# Altium PCB LV1.PCBDOC (part 2 of 2)
Units mm, origin at the board's own origin, x right, y up, seen from the top; angles counter-clockwise.
Board outline 220.06 x 100 mm, 4 copper layers (Component Side, Signal Layer 1, Signal Layer 2, Bottom Layer), stack 0.905 mm thick; 203 components, 130 nets, 643 pads, 1043 vias.
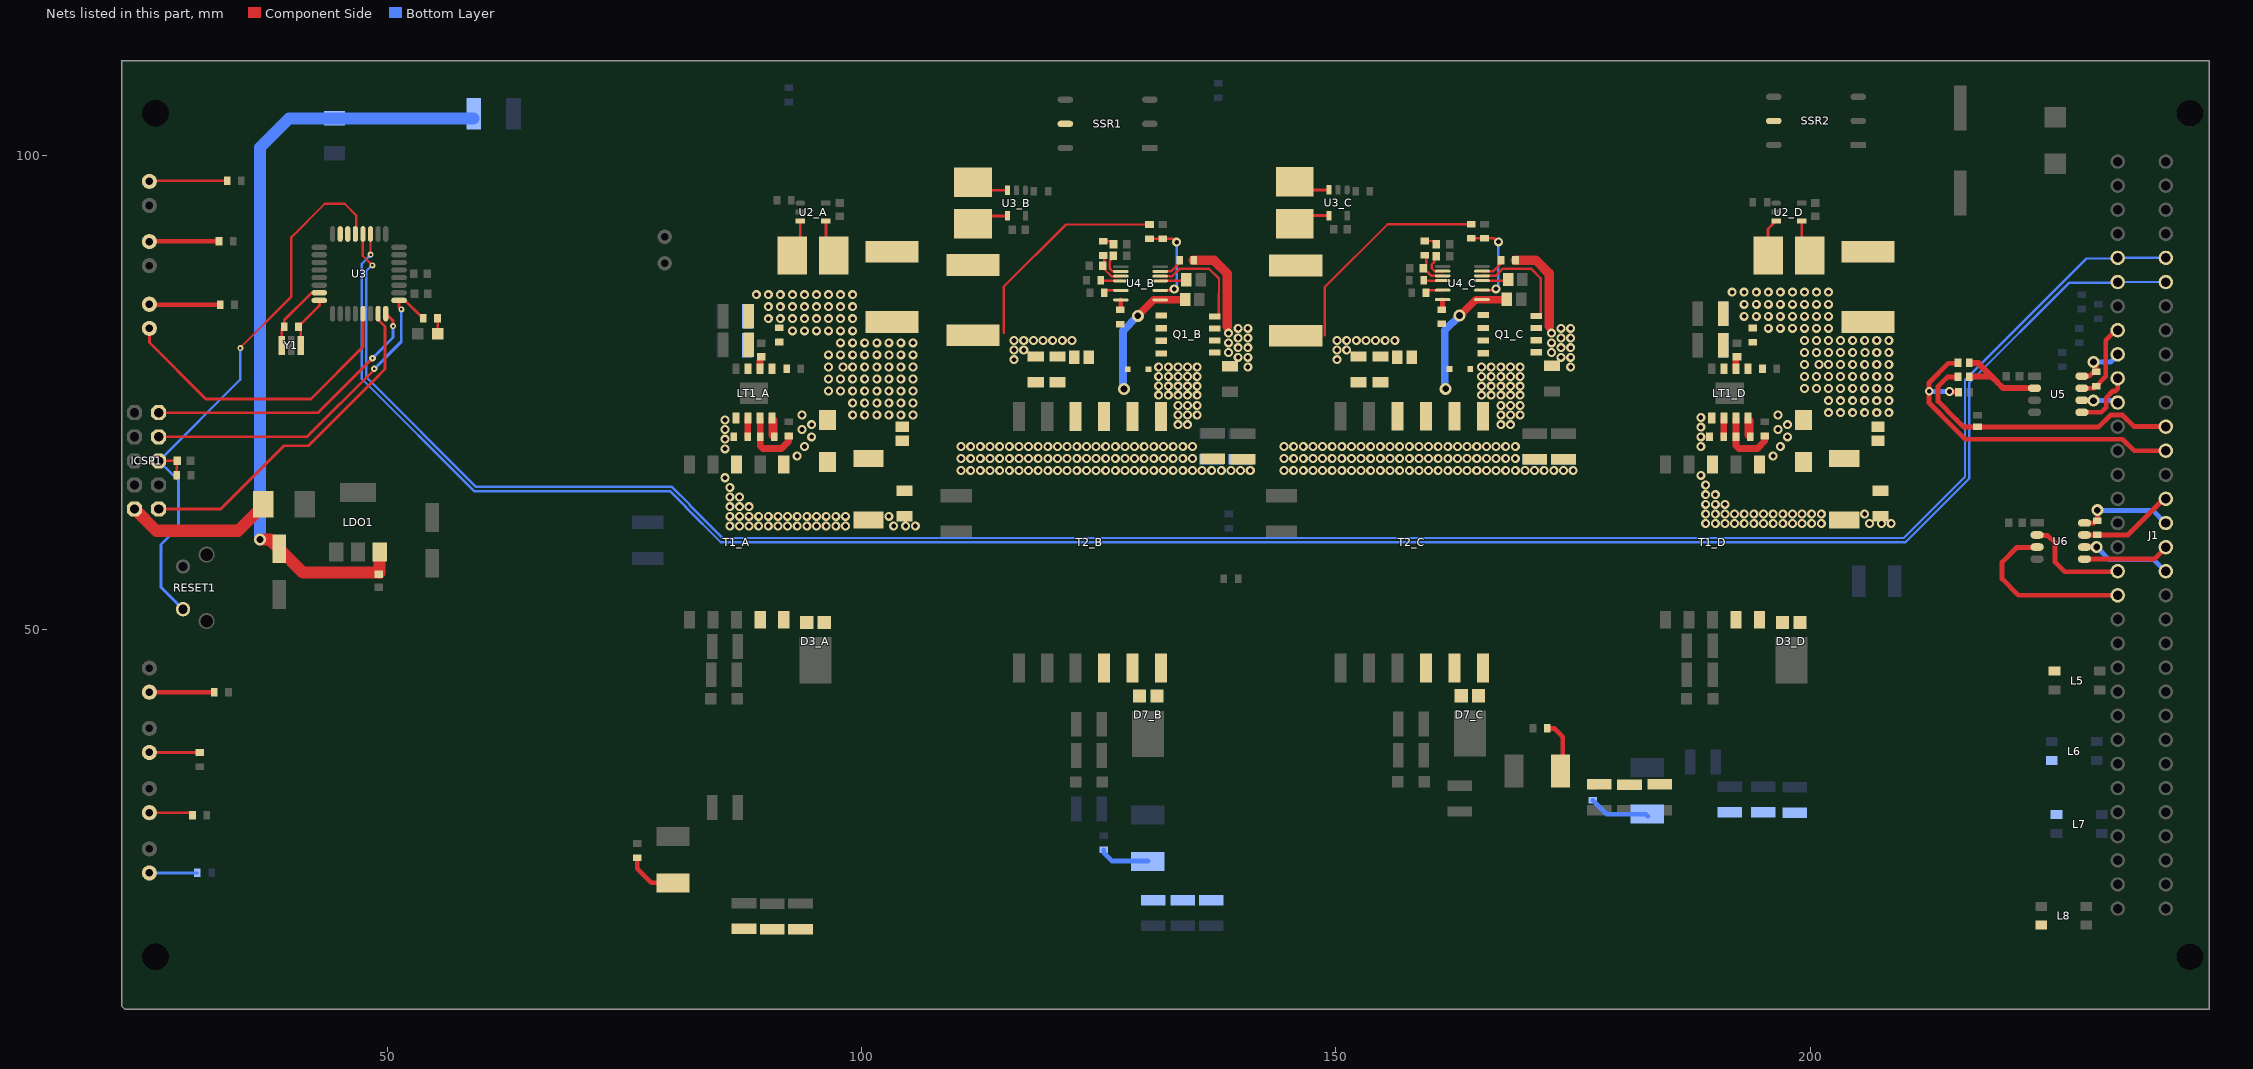
[diagram p4: the nets of this part, all layers, seen from the top]

## Via types
v1: diameter 0.95, hole 0.5, Component Side to Bottom Layer, 704 vias
v2: diameter 1.27, hole 0.711, Component Side to Bottom Layer, 313 vias
v3: diameter 0.635, hole 0.254, Component Side to Bottom Layer, 14 vias
v4: diameter 0.672, hole 0.381, Component Side to Bottom Layer, 4 vias
v5: diameter 0.762, hole 0.381, Component Side to Bottom Layer, 4 vias
v6: diameter 0.7, hole 0.254, Component Side to Bottom Layer, 3 vias
v7: diameter 0.9, hole 0.5, Component Side to Bottom Layer, 1 vias

## Nets (pads, with @x,y where several pads share a name; then routed paths per layer and width w, separated by ;. In a path a pad name is that pad's centre, name@x,y a point inside that pad or via, vN(x,y) a via of type N, cw(c..) or ccw(c..) an arc to the next point about the centre after c; other vN are vias at no path point) (continued)
LED2: D10.1 U3.13 | length 32.2
  Component Side w0.3: D10.1@24.924,81.788 24.924,80.296 30.87,74.35 41.96,74.35 47.46,79.85 U3.13@47.46,83.29
MISO: ICSP1.9 U3.16 | length 30.8
  Component Side w0.3: ICSP1.9@25.908,72.898 42.698,72.898 v6@48.385,78.585 ; U3.16@49.85,83.35 50.614,82.586 v3(50.614,82.018)
  Bottom Layer w0.3: v6(48.444,78.638) 50.62,80.814 v3@50.62,82.02
MOSI: ICSP1.1 U3.15 | length 36
  Component Side w0.3: ICSP1.1@25.908,62.738 32.448,62.738 39.12,69.41 41.69,69.41 41.69,69.42 42.057,69.787 42.057,69.79 48.57,76.303 48.573,76.303 49.76,77.49 49.76,81.986 49.03,82.716 49.03,83.22 U3.15@49.01,83.24
NetAC2_2: AC2.2 C1.1 DTVS1.1 F1.2 LDO1.3 | length 81.1
  Component Side w1.27: v2(36.59,59.52) 37.62,59.52 C1.1@38.51,58.63 ; C1.1@38.608,58.547 41.105,56.05 AC2.2@49.15,56.05 ; AC2.2@49.19,56.01 LDO1.3@49.19,58.23
  Bottom Layer w1.27: v2@36.6,59.6 36.6,100.862 39.624,103.886 F1.2@59.114,103.886
NetAR2_1: AR2.1 LED1.A | length 1.6
  Component Side w0.254: LED1.A@55.33,81.23 AR2.1@55.33,82.81
NetAR6_2: AR6.2 LED2.2 | length 8
  Component Side w0.3: LED2.2@25.146,97.344 AR6.2@33.12,97.344
NetC4_A_2: C4_A.2 C5_A.2 C6_A.2 C7_A.2 C8_A.2 D2_A.1 F2_A.2 LT1_A.3 R3_A.2 T1_A.5
  other v1: 93.218,68.326 93.98,69.342 94.742,70.358 93.726,71.12 94.742,71.628 93.726,72.644 99.06,72.644 100.33,72.644 101.6,72.644 102.87,72.644 104.14,72.644 105.41,72.644 99.06,73.914 100.33,73.914 101.6,73.914 102.87,73.914 104.14,73.914 105.41,73.914 96.52,75.184 97.79,75.184 99.06,75.184 100.33,75.184 101.6,75.184 102.87,75.184 104.14,75.184 105.41,75.184 96.52,76.454 97.79,76.454 99.06,76.454 100.33,76.454 101.6,76.454 102.87,76.454 104.14,76.454 105.41,76.454 96.52,77.724 98.044,77.724 99.06,77.724 100.33,77.724 101.6,77.724 102.87,77.724 104.14,77.724 105.41,77.724 102.895,78.969 96.52,78.994 97.79,78.994 99.06,78.994 100.33,78.994 101.6,78.994 104.14,78.994 105.41,78.994 97.79,80.264 99.06,80.264 100.33,80.264 101.6,80.264 102.87,80.264 104.14,80.264 105.41,80.264 92.71,81.534 93.98,81.534 95.25,81.534 96.52,81.534 97.79,81.534 99.06,81.534 90.17,82.804 91.44,82.804 92.71,82.804 93.98,82.804 95.25,82.804 96.52,82.804 97.79,82.804 99.06,82.804 90.17,84.074 91.44,84.074 92.71,84.074 93.98,84.074 95.25,84.074 96.52,84.074 97.79,84.074 99.06,84.074 88.9,85.344 90.17,85.344 91.44,85.344 92.71,85.344 93.98,85.344 95.25,85.344 96.52,85.344 97.79,85.344 99.06,85.344
NetC4_D_2: C4_D.2 C5_D.2 C6_D.2 C7_D.2 C8_D.2 D2_D.1 F2_D.2 LT1_D.3 R3_D.2 T1_D.5
  other v1: 196.088,68.326 196.85,69.342 197.612,70.358 196.596,71.12 197.612,71.628 196.596,72.644 201.93,72.898 203.2,72.898 204.47,72.898 205.74,72.898 207.01,72.898 208.28,72.898 201.93,74.168 203.2,74.168 204.47,74.168 205.74,74.168 207.01,74.168 208.28,74.168 199.39,75.438 200.66,75.438 201.93,75.438 203.2,75.438 204.47,75.438 205.74,75.438 207.01,75.438 208.28,75.438 199.39,76.708 200.66,76.708 201.93,76.708 203.2,76.708 204.47,76.708 205.74,76.708 207.01,76.708 208.28,76.708 199.39,77.978 200.914,77.978 201.93,77.978 203.2,77.978 204.47,77.978 205.74,77.978 207.01,77.978 208.28,77.978 199.39,79.248 200.66,79.248 201.93,79.248 203.2,79.248 204.47,79.248 205.765,79.248 207.01,79.248 208.28,79.248 199.39,80.518 200.66,80.518 201.93,80.518 203.2,80.518 204.47,80.518 205.74,80.518 207.01,80.518 208.28,80.518 195.58,81.788 196.85,81.788 198.12,81.788 199.39,81.788 200.66,81.788 201.93,81.788 193.04,83.058 194.31,83.058 195.58,83.058 196.85,83.058 198.12,83.058 199.39,83.058 200.66,83.058 201.93,83.058 193.04,84.328 194.31,84.328 195.58,84.328 196.85,84.328 198.12,84.328 199.39,84.328 200.66,84.328 201.93,84.328 191.77,85.598 193.04,85.598 194.31,85.598 195.58,85.598 196.85,85.598 198.12,85.598 199.39,85.598 200.66,85.598 201.93,85.598
NetC5_A_1: C5_A.1 R4_A.2
NetC5_D_1: C5_D.1 R4_D.2
NetC11_A_1: C11_A.1 LT1_A.2 | length 0.8
  Component Side w0.7: LT1_A.2@89.294,77.534 89.294,78.353
NetC11_D_1: C11_D.1 LT1_D.2 | length 0.8
  Component Side w0.7: LT1_D.2@192.164,77.534 192.164,78.353
NetC13_B_2: C13_B.2 C14_B.2 C15_B.2 C16_B.2 C17_B.2 F3_B.2 R8_B.2 R10_B.1 R11_B.1 T2_B.3 T2_B.4 U4_B.1 | length 36.9
  Component Side w0.254: 114.97,81.31 114.97,86.167 121.543,92.74 R8_B.2@130.35,92.74
  Component Side w0.8: v2(129.124,83.11) 130.803,84.789 U4_B.1@131.481,84.789 C13_B.2@134.105,84.789
  Bottom Layer w0.8: v2@127.561,75.476 127.561,81.547 v2(129.124,83.11)
  other v1: 110.49,66.802 111.506,66.802 112.522,66.802 113.538,66.802 114.554,66.802 115.57,66.802 116.586,66.802 117.602,66.802 118.618,66.802 119.634,66.802 120.65,66.802 121.666,66.802 122.682,66.802 123.698,66.802 124.714,66.802 125.73,66.802 126.746,66.802 127.762,66.802 128.778,66.802 129.794,66.802 130.81,66.802 131.826,66.802 132.842,66.802 133.858,66.802 134.874,66.802 135.89,66.802 136.906,66.802 137.922,66.802 138.938,66.802 139.954,66.802 140.97,66.802 110.49,68.072 111.506,68.072 112.522,68.072 113.538,68.072 114.554,68.072 115.57,68.072 116.586,68.072 117.602,68.072 118.618,68.072 119.634,68.072 120.65,68.072 121.666,68.072 122.682,68.072 123.698,68.072 124.714,68.072 125.73,68.072 126.746,68.072 127.762,68.072 128.778,68.072 129.794,68.072 130.81,68.072 131.826,68.072 132.842,68.072 133.858,68.072 134.874,68.072 110.49,69.342 111.506,69.342 112.522,69.342 113.538,69.342 114.554,69.342 115.57,69.342 116.586,69.342 117.602,69.342 118.618,69.342 119.634,69.342 120.65,69.342 121.666,69.342 122.682,69.342 123.698,69.342 124.714,69.342 125.73,69.342 126.746,69.342 127.762,69.342 128.778,69.342 129.794,69.342 130.81,69.342 131.826,69.342 132.842,69.342 133.858,69.342 134.874,69.342
  other v2: 127.651,75.386
NetC13_C_2: C13_C.2 C14_C.2 C15_C.2 C16_C.2 C17_C.2 F3_C.2 R8_C.2 R10_C.1 R11_C.1 T2_C.3 T2_C.4 U4_C.1 | length 37.2
  Component Side w0.254: 148.83,81.08 148.83,86.139 155.459,92.768 R8_C.2@164.266,92.768
  Component Side w0.8: v2(163.04,83.138) 164.719,84.817 U4_C.1@165.397,84.817 C13_C.2@168.021,84.817
  Bottom Layer w0.8: v2@161.477,75.504 161.477,81.575 v2(163.04,83.138)
  other v1: 144.526,66.802 145.542,66.802 146.558,66.802 147.574,66.802 148.59,66.802 149.606,66.802 150.622,66.802 151.638,66.802 152.654,66.802 153.67,66.802 154.686,66.802 155.702,66.802 156.718,66.802 157.734,66.802 158.75,66.802 159.766,66.802 160.782,66.802 161.798,66.802 162.814,66.802 163.83,66.802 164.846,66.802 165.862,66.802 166.878,66.802 167.894,66.802 168.91,66.802 169.926,66.802 170.942,66.802 171.958,66.802 172.974,66.802 173.99,66.802 175.006,66.802 144.526,68.072 145.542,68.072 146.558,68.072 147.574,68.072 148.59,68.072 149.606,68.072 150.622,68.072 151.638,68.072 152.654,68.072 153.67,68.072 154.686,68.072 155.702,68.072 156.718,68.072 157.734,68.072 158.75,68.072 159.766,68.072 160.782,68.072 161.798,68.072 162.814,68.072 163.83,68.072 164.846,68.072 165.862,68.072 166.878,68.072 167.894,68.072 168.91,68.072 144.526,69.342 145.542,69.342 146.558,69.342 147.574,69.342 148.59,69.342 149.606,69.342 150.622,69.342 151.638,69.342 152.654,69.342 153.67,69.342 154.686,69.342 155.702,69.342 156.718,69.342 157.734,69.342 158.75,69.342 159.766,69.342 160.782,69.342 161.798,69.342 162.814,69.342 163.83,69.342 164.846,69.342 165.862,69.342 166.878,69.342 167.894,69.342 168.91,69.342
  other v2: 161.567,75.414
NetC18_B_1: C18_B.1 D6_B.1
NetC18_B_2: C18_B.2 R10_B.2 R11_B.2
  other v1: 116.078,78.486 116.078,79.502 117.094,79.502 116.078,80.518 117.094,80.518 118.11,80.518 119.126,80.518 120.142,80.518 121.158,80.518 122.174,80.518
NetC18_C_1: C18_C.1 D6_C.1
NetC18_C_2: C18_C.2 R10_C.2 R11_C.2
  other v1: 150.114,78.486 150.114,79.502 151.13,79.502 150.114,80.518 151.13,80.518 152.146,80.518 153.162,80.518 154.178,80.518 155.194,80.518 156.21,80.518
NetC21_B_2: C21_B.2 U4_B.10 | length 2.9
  Component Side w0.254: C21_B.2@126.747,89.46 126.179,88.892 126.179,88.091 126.458,87.812 126.482,87.812 126.505,87.789 U4_B.10@127.331,87.789
NetC21_C_2: C21_C.2 U4_C.10 | length 2.7
  Component Side w0.254: C21_C.2@160.528,89.408 160.374,89.254 160.374,88.794 160.095,88.515 160.095,88.119 160.374,87.84 160.398,87.84 160.421,87.817 U4_C.10@161.247,87.817
NetC22_B_2: C22_B.2 R16_B.1 | length 1.5
  Component Side w0.254: R16_B.1@125.469,90.972 126.251,90.972 C22_B.2@126.747,90.476
NetC22_C_2: C22_C.2 R16_C.1 | length 1.5
  Component Side w0.254: R16_C.1@159.385,91 160.167,91 C22_C.2@160.663,90.504
NetC23_B_2: C23_B.2 R16_B.2 U4_B.11 | length 3.4
  Component Side w0.254: R16_B.2@125.588,89.353 125.588,88.026 126.325,87.289 U4_B.11@127.331,87.289
NetC23_C_2: C23_C.2 R16_C.2 U4_C.11 | length 3.5
  Component Side w0.254: R16_C.2@159.504,89.381 159.504,87.892 160.079,87.317 U4_C.11@161.247,87.317
NetC24_B_2: C24_B.2 U4_B.5 | length 2.8
  Component Side w0.254: U4_B.5@131.481,86.789 C24_B.2@134.244,86.789
NetC24_C_2: C24_C.2 U4_C.5 | length 2.8
  Component Side w0.254: U4_C.5@165.397,86.817 C24_C.2@168.16,86.817
NetC27_2: C27.2 C28.2 C29.2 L1.1 L5.1 R24.1 | length 4.8
  Component Side w0.5: R24.1@172.27,39.62 173.04,39.62 173.91,38.75 L1.1@173.91,35.98
NetC31_2: C31.2 C32.2 C33.2 L2.1 L6.3 R25.2 | length 6.5
  Bottom Layer w0.5: R25.2@177.07,32.04 178.53,30.58 182.68,30.58 L2.1@182.89,30.37
NetC35_1: C35.1 C36.1 C37.1 L3.1 L7.4 R26.2 | length 5.4
  Bottom Layer w0.5: R26.2@125.54,26.82 125.54,26.5 126.39,25.65 L3.1@130.23,25.65
NetC41_1: C41.1 C42.1 C43.1 L4.1 L8.2 R31.1 | length 5.8
  Component Side w0.5: R31.1@76.36,25.98 76.36,24.84 77.84,23.36 L4.1@80.43,23.36
NetD1_2: D1.2 ICSP1.2 | length 15.8
  Component Side w1.27: ICSP1.2@23.368,62.738 25.654,60.452 34.29,60.452 D1.2@37.084,63.246
NetD2_A_2: D2_A.2 D5_A.1
NetD2_D_2: D2_D.2 D5_D.1
NetD3_A_1: D3_A.1 T1_A.6 T1_A.7
NetD3_D_1: D3_D.1 T1_D.6 T1_D.7
NetD6_B_2: D6_B.2 Q1_B.5 Q1_B.6 Q1_B.7 Q1_B.8 R9_B.2 T2_B.1 T2_B.2
  other v1: 133.35,71.628 134.366,71.628 133.35,72.644 134.366,72.644 135.382,72.644 133.35,73.66 134.366,73.66 135.382,73.66 131.318,74.738 132.334,74.738 133.35,74.738 134.366,74.738 135.382,74.738 132.334,75.692 133.35,75.692 134.366,75.692 135.382,75.692 131.32,75.72 131.318,76.708 132.334,76.708 133.35,76.708 134.366,76.708 135.382,76.708 131.318,77.724 132.334,77.724 133.35,77.724 134.366,77.724 135.382,77.724
NetD6_C_2: D6_C.2 Q1_C.5 Q1_C.6 Q1_C.7 Q1_C.8 R9_C.2 T2_C.1 T2_C.2
  other v1: 167.386,71.628 168.402,71.628 167.386,72.644 168.402,72.644 169.418,72.644 167.386,73.66 168.402,73.66 169.418,73.66 165.354,74.738 166.37,74.738 167.386,74.738 168.402,74.738 169.418,74.738 165.354,75.692 166.37,75.692 167.386,75.692 168.402,75.692 169.418,75.692 165.354,76.708 166.37,76.708 167.386,76.708 168.402,76.708 169.418,76.708 165.354,77.724 166.37,77.724 167.386,77.724 168.402,77.724 169.418,77.724
NetD7_B_1: D7_B.1 T2_B.10 T2_B.11 T2_B.12
NetD7_C_1: D7_C.1 T2_C.10 T2_C.11 T2_C.12
NetD9_2: D9.2 R27.1 | length 7.4
  Component Side w0.5: D9.2@24.892,90.983 R27.1@32.27,90.983
NetD10_2: D10.2 R28.1 | length 7.5
  Component Side w0.5: D10.2@24.943,84.277 R28.1@32.397,84.277
NetD11_1: D11.1 R30.1 | length 5.3
  Bottom Layer w0.3: D11.1@24.67,24.384 R30.1@29.984,24.384
NetD12_1: D12.1 R32.1 | length 4.6
  Component Side w0.3: D12.1@24.67,30.734 R32.1@29.222,30.734
NetD13_1: D13.1 R33.1 | length 5.3
  Component Side w0.3: D13.1@24.67,37.084 R33.1@29.984,37.084
NetD14_1: D14.1 R34.1 | length 6.5
  Component Side w0.5: D14.1@25.146,43.434 R34.1@31.662,43.434
NetF2_A_1: F2_A.1 R2_A.2 U2_A.4 | length 2.8
  Component Side w0.3: R2_A.2@96.232,90.322 U2_A.4@96.232,93.094
NetF2_D_1: F2_D.1 R2_D.2 U2_D.4 | length 2.8
  Component Side w0.3: R2_D.2@199.102,90.322 U2_D.4@199.102,93.094
NetF3_B_1: F3_B.1 R7_B.2 U3_B.4 | length 2.8
  Component Side w0.3: R7_B.2@112.596,93.646 U3_B.4@115.368,93.646
NetF3_C_1: F3_C.1 R7_C.2 U3_C.4 | length 2.8
  Component Side w0.3: R7_C.2@146.512,93.674 U3_C.4@149.284,93.674
NetJ1_14: J1.14 R23.1 U6.7 | length 10.1
  Component Side w0.508: U6.7@228.914,60.008 233.49,60.008 237.236,63.754 J1.14@237.49,63.754
NetJ1_15: J1.15 R23.2 U6.8 | length 10.5
  Component Side w0.508: U6.8@228.914,61.278 229.934,61.278 R23.2@230.264,61.608 ; v2(230.264,62.624) R23.2@230.264,61.608 ; R23.2@230.378,61.722 R23.2@230.264,61.608
  Bottom Layer w0.508: v2(230.264,62.624) 230.294,62.594 236.11,62.594 J1.15@237.49,61.214
NetJ1_16: J1.16 U6.5 | length 9.1
  Component Side w0.508: U6.5@228.914,57.468 236.284,57.468 J1.16@237.49,58.674
NetJ1_17: J1.17 U6.6 | length 9.7
  Component Side w0.508: U6.6@228.914,58.738 v2(230.188,58.738)
  Bottom Layer w0.508: v2(230.188,58.738) 231.52,57.406 232.914,57.406 232.916,57.404 236.22,57.404 J1.17@237.49,56.134
NetJ1_39: J1.39 R22.2 U5.7 | length 8.3
  Component Side w0.508: U5.7@228.64,75.479 R22.2@229.911,75.479 ; R22.2@230.124,75.704 231.14,76.72 231.14,80.518 J1.39@232.41,81.788
NetJ1_40: J1.40 R22.1 U5.8 | length 5.4
  Component Side w0.508: U5.8@228.64,76.749 229.403,76.749 R22.1@229.87,77.216 ; v2(229.87,78.232) 230.124,77.978 R22.1@230.124,77.204
  Bottom Layer w0.508: v2(229.87,78.232) 231.648,78.232 J1.40@232.41,78.994
NetJ1_41: J1.41 U5.5 | length 6.4
  Component Side w0.508: U5.5@228.64,72.939 230.673,72.939 231.194,73.46 231.194,74.474 231.906,75.186 232.158,75.186 232.41,75.438 J1.41@232.41,76.454
NetJ1_42: J1.42 U5.6 | length 3.9
  Component Side w0.508: U5.6@228.64,74.209 229.829,74.209 v2(229.87,74.168)
  Bottom Layer w0.508: v2(229.87,74.168) 232.156,74.168 J1.42@232.41,73.914
NetLT1_A_1: LT1_A.1 R3_A.1 R5_A.2
NetLT1_A_6: LT1_A.6 Rfb1_A.1 | length 2
  Component Side w0.7: Rfb1_A.1@88.012,70.339 LT1_A.6@88.012,72.315
NetLT1_A_7: LT1_A.7 Rref1_A.1 Rtc1_A.2 | length 6.9
  Component Side w0.7: LT1_A.7@89.306,72.315 Rtc1_A.2@89.306,70.339 89.306,69.418 89.596,69.128 91.556,69.128 92.342,69.914 Rref1_A.1@92.342,70.434
NetLT1_A_8: LT1_A.8 Rtc1_A.1 | length 3.9
  Component Side w0.7: Rtc1_A.1@90.564,70.497 LT1_A.8@90.564,72.327 90.806,72.085 Rtc1_A.1@90.806,70.339
NetLT1_D_1: LT1_D.1 R3_D.1 R5_D.2
NetLT1_D_6: LT1_D.6 Rfb1_D.1 | length 2
  Component Side w0.7: Rfb1_D.1@190.882,70.339 LT1_D.6@190.882,72.315
NetLT1_D_7: LT1_D.7 Rref1_D.1 Rtc1_D.2 | length 6.9
  Component Side w0.7: LT1_D.7@192.176,72.315 Rtc1_D.2@192.176,70.339 192.176,69.418 192.466,69.128 194.426,69.128 195.212,69.914 Rref1_D.1@195.212,70.434
NetLT1_D_8: LT1_D.8 Rtc1_D.1 | length 3.9
  Component Side w0.7: Rtc1_D.1@193.434,70.497 LT1_D.8@193.434,72.327 193.676,72.085 Rtc1_D.1@193.676,70.339
NetQ1_B_1: Q1_B.1 Q1_B.2 Q1_B.3 R13_B.1 R17_B.2 | length 9.7
  Component Side w1: R13_B.1@134.982,88.952 137.153,88.952 138.55,87.555 138.55,81.967
  other v1: 140.716,77.724 139.7,78.74 140.716,78.74 138.684,79.248 139.7,79.756 140.716,79.756 138.684,80.264 139.7,80.772 140.716,80.772 138.684,81.28 139.7,81.788 140.716,81.788
NetQ1_B_4: Q1_B.4 U4_B.6 | length 11.6
  Component Side w0.254: U4_B.6@131.481,87.289 132.755,87.289 133.529,88.063 136.645,88.063 137.676,87.032 137.676,85.455 137.668,85.447 137.668,83.11 Q1_B.4@136.932,83.11
NetQ1_C_1: Q1_C.1 Q1_C.2 Q1_C.3 R13_C.1 R17_C.2 | length 9.7
  Component Side w1: R13_C.1@168.898,88.98 171.069,88.98 172.466,87.583 172.466,81.995
  other v1: 174.752,77.724 173.736,78.74 174.752,78.74 172.72,79.248 173.736,79.756 174.752,79.756 172.72,80.264 173.736,80.772 174.752,80.772 172.72,81.28 173.736,81.788 174.752,81.788
NetQ1_C_4: Q1_C.4 U4_C.6 | length 11.6
  Component Side w0.254: U4_C.6@165.397,87.317 166.819,87.317 167.283,87.781 167.283,87.783 167.591,88.091 170.561,88.091 171.592,87.06 171.592,85.483 171.577,85.468 171.577,83.138 Q1_C.4@170.848,83.138
NetR8_B_1: R8_B.1 R12_B.2 U4_B.3 | length 9.8
  Component Side w0.254: R8_B.1@130.35,91.24 R12_B.2@131.747,91.24 132.864,91.24 v1@133.198,90.907 ; U4_B.3@131.481,85.789 132.824,85.789 v1(132.959,85.924) ; v1@133.213,90.907 v1@133.213,91.1
  Bottom Layer w0.254: v1(132.959,85.924) 133.213,86.178 v1(133.213,90.877)
NetR8_C_1: R8_C.1 R12_C.2 U4_C.3 | length 10.3
  Component Side w0.254: R8_C.1@164.266,91.268 R12_C.2@165.663,91.268 166.669,91.268 v1@167.107,90.83 ; U4_C.3@165.397,85.817 166.74,85.817 v1(166.875,85.952) 167.03,85.952 v1@167.171,85.811 ; v1(167.129,90.905) v1@167.461,90.905
  Bottom Layer w0.254: v1(166.875,85.952) 167.129,86.206 v1(167.129,90.905)
NetR9_B_1: R9_B.1 U4_B.16 | length 1
  Component Side w0.5: R9_B.1@127.331,83.817 U4_B.16@127.331,84.789
NetR9_C_1: R9_C.1 U4_C.16 | length 1
  Component Side w0.5: R9_C.1@161.247,83.845 U4_C.16@161.247,84.817
NetR13_B_2: R13_B.2 U4_B.7 | length 2.3
  Component Side w0.254: U4_B.7@131.481,87.789 132.613,87.789 133.407,88.583 R13_B.2@133.482,88.583
NetR13_C_2: R13_C.2 U4_C.7 | length 2.3
  Component Side w0.254: U4_C.7@165.397,87.817 166.604,87.817 R13_C.2@167.398,88.611
NetR14_B_2: R14_B.2 U4_B.12 | length 2
  Component Side w0.254: R14_B.2@125.31,86.789 U4_B.12@127.331,86.789
NetR14_C_2: R14_C.2 U4_C.12 | length 1.9
  Component Side w0.254: R14_C.2@159.346,86.817 U4_C.12@161.247,86.817
NetR15_B_1: R15_B.1 U4_B.14 | length 1.5
  Component Side w0.254: R15_B.1@125.85,85.789 U4_B.14@127.331,85.789
NetR15_C_1: R15_C.1 U4_C.14 | length 1.5
  Component Side w0.254: R15_C.1@159.766,85.817 U4_C.14@161.247,85.817
RESET: AC3.1 AR3.1 ICSP1.5 RESET1.2 U3.29 | length 61.5
  Component Side w0.254: ICSP1.5@25.908,67.818 AC3.1@27.788,67.818 ; v3@34.445,79.695 39.89,85.14 39.89,91.39 43.42,94.92 45.52,94.92 46.74,93.7 U3.29@46.74,91.79
  Component Side w0.3: AR3.1@27.81,66.32 AC3.1@27.81,67.76
  Bottom Layer w0.254: ICSP1.5@25.98,67.85 34.51,76.38 v3(34.51,79.7)
  Bottom Layer w0.3: ICSP1.5@25.99,67.76 28.01,65.74 28.01,60.856 26.162,59.008 26.162,54.497 RESET1.2@28.473,52.186
ROB: B5.2 B7.2 U5.2 | length 10.4
  Component Side w0.635: B5.2@216.74,78.16 B5.2@216.77,78.13 ; B7.2@216.77,76.72 216.8,76.69 219.15,76.69 ; B5.2@216.81,78.11 216.83,78.13 217.71,78.13 219.15,76.69 ; U5.2@223.64,75.479 220.343,75.479 219.737,76.085 219.737,76.103 219.15,76.69
RX0: U3.30
RXA: J1.49 U6.2 | length 11.2
  Component Side w0.508: U6.2@224.028,59.944 225.044,59.944 225.806,59.182 225.806,57.15 226.822,56.134 232.354,56.134 J1.49@232.41,56.19
RXB: B5.1 B6.1 J1.12 | length 36
  Component Side w0.508: v1@214.59,75.07 214.64,75.12 v1(214.68,75.12) 214.73,75.07 B6.1@215.62,75.07 B6.1@215.64,75.07 ; B5.1@215.61,78.11 214.56,78.11 212.53,76.08 212.53,75.674 212.52,75.664 212.52,73.93 215.175,71.275 216.346,70.104 231.904,70.104 231.906,70.106 232.914,70.106 234.13,68.89 J1.12@237.49,68.89
  Bottom Layer w0.508: v7@212.87,75.12 v1(214.68,75.12)
  other v7: 212.55,75.15
SCK: AR2.2 ICSP1.7 U3.17 | length 37.5
  Component Side w0.3: ICSP1.7@25.908,70.358 41.548,70.358 v6@48.65,77.46 ; v3@51.51,83.78 51.24,84.05 U3.17@51.24,84.74 51.88,84.74 AR2.2@53.76,82.86
  Bottom Layer w0.3: v6(48.624,77.518) 51.48,80.374 v3@51.48,83.78
  other v3: 51.484,83.798
SCL: J1.4 J1.36 U3.28 | length 230.8
  Component Side w0.254: U3.28@47.42,91.81 47.42,89.442 v3(48.434,88.428)
  Bottom Layer w0.254: v3@48.374,88.404 47.79,87.82 47.78,87.82 47.78,78.931 47.767,78.918 47.767,78.358 47.78,78.345 47.78,76.65 59.35,65.08 80.009,65.08 81.901,63.188 81.901,63.133 85.344,59.69 209.85,59.69 216.31,66.15 216.31,76.35 229.114,89.154 232.354,89.154 J1.36@232.41,89.21 J1.4@237.49,89.21
SDA: J1.5 J1.37 U3.27 | length 230.3
  Component Side w0.254: v3@48.24,89.75 U3.27@48.24,91.74 U3.27@48.24,91.78 ; v3(48.25,89.55) v3@48.25,89.76
  Bottom Layer w0.254: v3@48.3,89.41 48.144,89.41 47.313,88.579 47.313,76.475 59.162,64.626 79.821,64.626 81.447,63 81.447,62.945 85.156,59.236 210.038,59.236 216.764,65.962 216.764,76.05 227.328,86.614 J1.37@232.41,86.614 ; J1.37@232.41,86.67 J1.5@237.49,86.67
SW_A: D5_A.2 LT1_A.5 R4_A.1 Rfb1_A.2 T1_A.3
  other v1: 86.106,60.96 87.122,60.96 88.138,60.96 89.154,60.96 90.17,60.96 91.186,60.96 92.202,60.96 93.218,60.96 94.234,60.96 95.25,60.96 96.266,60.96 97.282,60.96 98.298,60.96 103.378,60.96 104.648,60.96 105.664,60.96 86.106,61.976 87.122,61.976 88.138,61.976 89.154,61.976 90.17,61.976 91.186,61.976 92.202,61.976 93.218,61.976 94.234,61.976 95.25,61.976 96.266,61.976 97.282,61.976 98.298,61.976 102.87,61.976 86.106,62.992 87.122,62.992 88.138,62.992 86.106,64.008 87.122,64.008 86.106,65.024 85.598,66.04 85.598,69.088 85.598,70.104 85.598,71.12 85.598,72.136
SW_D: D5_D.2 LT1_D.5 R4_D.1 Rfb1_D.2 T1_D.3
  other v1: 188.976,61.214 189.992,61.214 191.008,61.214 192.024,61.214 193.04,61.214 194.056,61.214 195.072,61.214 196.088,61.214 197.104,61.214 198.12,61.214 199.136,61.214 200.152,61.214 201.168,61.214 206.248,61.214 207.518,61.214 208.534,61.214 188.976,62.23 189.992,62.23 191.008,62.23 192.024,62.23 193.04,62.23 194.056,62.23 195.072,62.23 196.088,62.23 197.104,62.23 198.12,62.23 199.136,62.23 200.152,62.23 201.168,62.23 205.74,62.23 188.976,63.246 189.992,63.246 191.008,63.246 188.976,64.262 189.992,64.262 188.976,65.278 188.468,66.294 188.468,69.342 188.468,70.358 188.468,71.374 188.468,72.39
TX0: U3.31
TXA: J1.50 U6.3 | length 18.9
  Component Side w0.508: U6.3@223.774,58.674 221.742,58.674 220.218,57.15 220.218,55.372 221.94,53.65 J1.50@232.41,53.65
TXB: B7.1 B8.1 J1.11 | length 30.2
  Component Side w0.508: B7.1@215.57,76.65 214.44,76.65 213.47,75.68 213.47,74.09 215.395,72.165 215.405,72.165 216.18,71.39 ; 216.226,71.374 230.378,71.374 231.648,72.644 231.904,72.644 231.906,72.646 232.914,72.646 234.13,71.43 J1.11@237.49,71.43
VINA: R2_A.1 R7_B.1 SSR1.5 U2_A.3 U3_B.3 | length 5.5
  Component Side w0.3: R2_A.1@93.532,90.322 U2_A.3@93.532,93.094 ; R7_B.1@112.596,96.346 U3_B.3@115.368,96.346
VINB: R2_D.1 R7_C.1 SSR2.5 U2_D.3 U3_C.3 | length 6.7
  Component Side w0.3: R7_C.1@146.512,96.374 U3_C.3@149.284,96.374 ; R2_D.1@195.552,89.472 195.552,92.244 U2_D.3@196.402,93.094
XTAL1: AR1.1 U3.7 Y1.3 | length 7.6
  Component Side w0.3: Y1.3@38.874,80 38.874,81.644 AR1.1@39.15,81.92 ; AR1.1@39.14,81.98 39.14,82.66 42.01,85.53 U3.7@42.8,85.53
XTAL2: AR1.2 U3.8 Y1.1 | length 5.7
  Component Side w0.3: Y1.1@40.89,80 40.89,81.75 40.65,81.99 42.86,84.2 U3.8@42.86,84.71
pads on no net: ICSP1.3 J1.0@240.03,15.55 J1.0@240.03,104.45 RESET1.0 SSR1.3 SSR2.3 T1_A.1 T1_A.2 T1_A.4 T1_A.8 T1_D.1 T1_D.2 T1_D.4 T1_D.8 T2_B.5 T2_B.6 T2_C.5 T2_C.6 U3.2 U3.22

## Polygon pours and split planes (outlines as drawn)
-5VARTN on Bottom Layer "-5VGNDA_L02_P642" (solid, pour order 3477): 102.248,33.02 86.106,33.02 86.106,57.976 102.248,57.976
-5VARTN on Bottom Layer "Component Side-No Net 2" (solid, pour order 3449): 86.106,57.15 86.106,54.61 75.946,54.61 75.946,58.166 82.55,58.166 83.566,57.15 83.82,57.15
-5VA on Bottom Layer "-5VA_L01_P619" (solid, pour order 3468): 84.976,54.102 75.832,54.102 75.832,34.036 84.976,34.036
+5VARTN on Bottom Layer "Component Side-No Net" (solid, pour order 3479): 123.222,14.746 123.222,52.832 108.458,52.832 108.458,14.727
+5VARTN on Bottom Layer "Component Side-No Net" (solid, pour order 3478): 108.48,14.559 108.48,19.601 211.096,19.601 211.096,14.502
+5VA on Bottom Layer "Component Side-No Net" (solid, pour order 3469): 124.746,29.7 124.746,47.646 135.795,47.646 135.795,29.7
GND on Bottom Layer "Component Side-No Net 2" (solid, pour order 3444): 208.28,56.896 212.852,56.896 213.614,56.134 213.868,55.88 213.868,53.34 208.28,53.34
GND on Bottom Layer "Component Side-No Net 2" (solid, pour order 3474): 210.058,50.292 210.058,60.96 237.998,60.96 238.252,60.706 238.252,50.292
NetC4_D_2 on Bottom Layer "NETC11_LV4_2_L01_P618" (solid, remove dead copper, pour order 3472): 208.788,86.106 190.246,86.106 190.246,76.962 194.564,76.962 194.564,66.548 195.326,66.548 198.374,70.866 199.644,70.866 208.788,70.866
SW_D on Bottom Layer "SW_LV4_L01_P595" (solid, pour order 3456): 209.182,60.516 188.354,60.516 188.354,72.962 190.386,72.962 190.386,65.088 190.64,64.834 192.418,63.056 192.926,62.548 209.182,62.548
NetQ1_C_1 on Bottom Layer "NETQ1_C_1_L04_P3447" (solid, pour order 3447): 170.382,82.296 175.058,82.296 175.058,77.311 170.382,77.311
NetD6_C_2 on Bottom Layer "Component Side-No Net" (solid, pour order 3461): 161.798,70.866 161.798,73.914 163.068,73.914 163.957,74.803 163.957,77.978 163.957,82.654 164.742,83.439 169.917,83.439 169.917,72.381 168.402,70.866
NetC4_A_2 on Bottom Layer "NETC11_LV4_2_L01_P618" (solid, remove dead copper, pour order 3471): 106.058,86.17 87.516,86.17 87.516,77.026 91.834,77.026 91.834,66.612 92.596,66.612 95.644,70.93 96.914,70.93 106.058,70.93
SW_A on Bottom Layer "SW_LV4_L01_P595" (solid, pour order 3455): 106.058,60.516 85.23,60.516 85.23,72.962 87.262,72.962 87.262,65.088 87.516,64.834 89.294,63.056 89.802,62.548 106.058,62.548
NetC13_C_2 on Bottom Layer "NETC13_C_2_L04_P3466" (solid, pour order 3466): 176.53,69.596 176.53,66.04 143.764,66.04 143.764,69.596
NetC13_C_2 on Bottom Layer "Component Side-No Net 1" (solid, pour order 3457): 143.764,69.533 143.764,84.391 148.582,84.391 148.59,84.383 148.59,69.405
-5VBRTN on Bottom Layer "-5VGNDB_L02_P638" (solid, pour order 3476): 205.346,32.93 189.992,32.93 189.992,58.071 205.346,58.071
+5VBRTN on Bottom Layer "Component Side-No Net" (solid, pour order 3473): 157.138,32.866 157.138,52.324 142.374,52.324 142.374,32.847
GND on Bottom Layer "GNDbottom" (solid, pour order 3480): 176.315,101.813 176.315,63.326 142.36,63.326 142.36,101.813
+5VB on Bottom Layer "Component Side-No Net" (solid, pour order 3467): 158.662,32.852 158.662,47.674 169.711,47.674 169.711,32.852
GND on Bottom Layer "Component Side-No Net" (solid, pour order 3481): 23.045,60.96 23.114,60.891 23.114,17.79 71.51,17.79 71.51,54.851 76.11,60.96
-5VBRTN on Bottom Layer "Component Side-No Net" (solid, pour order 3454): 194.818,32.85 194.818,36.11 216.57,36.11 213.31,32.85
-5VB on Bottom Layer "Component Side-No Net" (solid, pour order 3470): 187.706,34.41 178.3,34.41 178.3,57.944 187.706,57.944
NetC31_2 on Bottom Layer "Component Side-No Net" (solid, pour order 3464): 181.18,28.61 181.18,31.67 216.88,31.67 213.82,28.61
NetC35_1 on Bottom Layer "Component Side-No Net" (solid, pour order 3475): 128.43,25.276 128.43,20.704 212.36,20.704 212.36,25.276
+5V on Bottom Layer "Component Side-No Net" (solid, pour order 3462): 42.814,59.368 40.314,59.368 40.314,65.968 40.386,66.04 53.34,66.04 53.34,59.368 44.45,59.368
GND on Bottom Layer "GND_L02_P1210" (solid, pour order 3482): 22.86,109.354 238.16,109.354 238.16,60.84 22.86,60.84
NetD6_B_2 on Bottom Layer "Component Side-No Net" (solid, pour order 3460): 127.882,70.918 127.882,73.966 129.152,73.966 130.041,74.855 130.041,78.03 130.041,82.706 130.826,83.491 136.001,83.491 136.001,72.433 134.486,70.918
NetC13_B_2 on Bottom Layer "NETC13_B_2_L04_P3465" (solid, pour order 3465): 142.24,69.596 142.24,66.04 109.474,66.04 109.474,69.596
NetQ1_B_1 on Bottom Layer "NETQ1_B_1_L04_P3448" (solid, pour order 3448): 136.541,82.221 141.217,82.221 141.217,77.236 136.541,77.236
NetC18_B_2 on Bottom Layer "Component Side-No Net 1" (solid, pour order 3445): 123.19,78.015 123.135,78.07 115.57,78.07 115.57,81.026 123.19,81.026
NetC13_B_2 on Bottom Layer "Component Side-No Net 1" (solid, pour order 3458): 109.474,69.471 109.474,84.328 114.292,84.328 114.3,84.32 114.3,69.342
NetC18_C_2 on Bottom Layer "Component Side-No Net 1" (solid, pour order 3446): 156.972,78.015 156.917,78.07 149.352,78.07 149.352,81.026 156.972,81.026
-5VBRTN on Bottom Layer "Component Side-No Net 2" (solid, pour order 3453): 210.29,35.59 210.29,35.63 214.35,39.69 226.74,39.69 226.74,37.69 226.7,37.65 226.37,37.32 220.07,37.32 217.79,37.32 216.269,35.799
NetC31_2 on Bottom Layer "Component Side-No Net 2" (solid, pour order 3450): 216.26,31.05 220.07,34.86 225.37,34.86 225.92,34.86 226.68,35.62 226.78,35.72 226.78,36.97 218.26,36.97 212.86,31.57
+5VA_FILTERED on Bottom Layer "Component Side-No Net 2" (solid, pour order 3452): 229.9,29.84 229.9,34.28 238.05,34.28 238.54,33.79 238.54,30.25 238.14,29.85
+5VGNDA on Bottom Layer "Component Side-No Net 2" (solid, pour order 3451): 229.84,24.78 229.84,29.22 237.99,29.22 238.48,28.73 238.48,25.19 238.08,24.79
NetC35_1 on Bottom Layer "Component Side-No Net 2" (solid, pour order 3459): 212.04,25.3 220.11,33.37 223.2,33.37 225.55,33.37 227.02,31.9 227,31.88 227,30.04 222.71,30.04 213.51,20.84 213.39,20.72 210.93,20.72
+5VARTN on Bottom Layer "Component Side-No Net 2" (solid, pour order 3463): 211.02,14.52 215.06,14.52 226.95,26.41 226.95,29.04 223.01,29.04 215.19,21.22 213.58,19.61 210.93,19.61
GND on Component Side "Component Side-No Net 2" (solid, pour order 3388): 203.098,104.216 208.432,104.216 208.483,104.267 208.636,104.115 208.636,98.527 203.327,98.527 203.073,98.781
32V on Component Side "Component Side-No Net 2" (solid, pour order 3418): 201.651,108.331 201.701,108.382 217.754,108.382 231.902,108.382 234.747,105.537 233.705,104.496 201.445,104.496
32V on Component Side "Component Side-No Net 2" (solid, pour order 3416): 238.227,101.549 238.227,102.083 233.731,106.578 233.705,106.553 221.92,106.553 209.093,106.553 208.991,106.451 208.788,106.248 208.788,102.641 230.251,102.641 231.826,101.067
GND on Component Side "Component Side-No Net 2" (solid, pour order 3412): 128.676,99.513 128.676,105.385 128.854,105.207 141.656,105.207 141.656,97.434 141.757,97.333
32V on Component Side "Component Side-No Net 2" (solid, pour order 3397): 120.574,107.747 120.599,107.721 120.599,105.512 123.088,105.512 123.495,105.105 123.52,105.08 123.52,103.175 123.52,102.895 123.139,102.514 123.063,102.438 120.574,102.438 120.574,100.076 120.726,99.924 128.245,99.924 128.245,107.544 128.067,107.721
VINB on Component Side "Component Side-No Net 2" (solid, pour order 3380): 188.118,103.384 190.348,105.613 190.398,105.664 197.282,105.664 197.587,105.664 197.942,105.308 197.942,103.759 197.942,103.403 197.485,102.946 197.409,102.87 189.627,102.87
32V on Component Side "Component Side-No Net 2" (solid, pour order 3427): 120.65,108.649 120.65,105.816 197.739,105.816 198.145,105.41 198.171,105.385 198.171,103.48 198.171,103.2 197.79,102.819 197.206,102.235 195.224,102.235 195.224,100.381 195.377,100.228 202.895,100.228 202.895,107.848 202.371,108.372
VINB on Component Side "Component Side-No Net" (solid, pour order 3420): 193.192,102.87 143.548,102.87 143.548,105.562 193.192,105.562
NetC4_A_2 on Component Side "NETC11_LV4_2_L01_P618" (solid, remove dead copper, pour order 3428): 106.172,86.106 87.63,86.106 87.63,76.962 91.948,76.962 91.948,66.548 92.71,66.548 95.758,70.866 97.028,70.866 106.172,70.866
GND on Component Side "Component Side-No Net 2" (solid, pour order 3431): 22.86,60.706 22.86,51.308 56.134,51.308 56.134,51.562 65.278,60.706
+5V on Component Side "Component Side-No Net 2" (solid, pour order 3415): 56.5,59.69 40.132,59.69 40.132,66.548 56.5,66.548
+5VB on Component Side "Component Side-No Net" (solid, pour order 3414): 158.699,41.488 158.699,33.995 158.699,32.979 169.8,32.979 169.8,41.488
VINB on Component Side "Component Side-No Net" (solid, pour order 3387): 147.694,95.564 143.63,95.564 143.63,103.2 147.694,103.2
NetF3_C_1 on Component Side "NETF2_LV4_1_L01_P581" (solid, pour order 3376): 147.613,87.906 143.746,87.907 143.746,93.621 147.613,93.621
NetC13_C_2 on Component Side "Component Side-No Net" (solid, pour order 3425): 149.137,82.39 149.137,70.259 169.2,70.259 169.2,68.664 175.26,68.664 175.26,66.194 142.95,66.194 142.95,82.39
+5VBRTN on Component Side "Component Side-No Net" (solid, pour order 3437): 157.109,60.96 157.109,44.384 157.109,26.95 142.374,26.95 142.374,60.96
NetD7_C_1 on Component Side "Component Side-No Net" (solid, pour order 3399): 158.676,47.589 158.676,44.414 158.676,42.25 169.777,42.25 169.777,47.589
NetD6_C_2 on Component Side "Component Side-No Net" (solid, pour order 3366): 160.655,82.334 160.655,80.598 161.417,79.836 163.957,79.836 163.957,82.334
NetQ1_C_1 on Component Side "Component Side-No Net" (solid, pour order 3378): 170.457,82.249 175.133,82.249 175.133,77.264 170.457,77.264
NetD6_C_2 on Component Side "Component Side-No Net" (solid, pour order 3410): 161.798,70.946 161.798,73.994 163.068,73.994 163.957,74.883 163.957,78.058 163.957,82.734 164.742,83.519 169.917,83.519 169.917,72.461 168.402,70.946
GND on Component Side "GNDtop" (solid, pour order 3439): 149.518,99.342 149.518,85.43 149.518,81.66 142.63,81.66 142.63,63.453 176.315,63.453 176.315,99.342
GND on Component Side "GNDtop" (solid, pour order 3438): 115.602,99.314 115.602,66.294 108.444,66.294 108.444,63.425 142.399,63.425 142.399,99.314
NetC18_B_1 on Component Side "Component Side-No Net" (solid, pour order 3372): 128.263,77.014 123.444,77.014 123.444,79.502 128.263,79.502
NetD6_B_2 on Component Side "Component Side-No Net" (solid, pour order 3409): 127.882,70.918 127.882,73.966 129.152,73.966 130.041,74.855 130.041,78.03 130.041,82.706 130.826,83.491 136.001,83.491 136.001,72.433 134.486,70.918
NetQ1_B_1 on Component Side "Component Side-No Net" (solid, pour order 3379): 136.541,82.221 141.217,82.221 141.217,77.236 136.541,77.236
NetD6_B_2 on Component Side "Component Side-No Net" (solid, pour order 3367): 126.739,82.306 126.739,80.57 127.501,79.808 130.041,79.808 130.041,82.306
NetC13_B_2 on Component Side "Component Side-No Net" (solid, pour order 3401): 115.57,74.855 120.135,74.855 120.591,74.399 120.591,69.394 126.231,69.394 126.231,74.22 127.474,74.22 128.517,75.067 128.517,77.216 115.57,77.216
NetD7_B_1 on Component Side "Component Side-No Net" (solid, pour order 3400): 124.76,47.561 124.76,44.386 124.76,42.222 135.861,42.222 135.861,47.561
+5VARTN on Component Side "Component Side-No Net" (solid, pour order 3434): 123.193,60.96 123.193,44.356 123.193,32.951 108.458,32.951 108.458,60.96
NetC13_B_2 on Component Side "Component Side-No Net" (solid, pour order 3424): 115.221,82.26 115.221,70.231 135.284,70.231 135.284,68.636 141.558,68.636 141.558,66.166 108.96,66.166 108.96,82.26
NetF3_B_1 on Component Side "NETF2_LV4_1_L01_P581" (solid, pour order 3377): 113.697,87.878 109.83,87.879 109.83,93.593 113.697,93.593
VINA on Component Side "Component Side-No Net" (solid, pour order 3386): 113.778,95.536 109.714,95.536 109.714,102.946 113.778,102.946
+5VA on Component Side "Component Side-No Net" (solid, pour order 3413): 124.783,41.46 124.783,33.967 124.783,32.951 135.884,32.951 135.884,41.46
+5VBRTN on Component Side "Component Side-No Net" (solid, pour order 3406): 223.79,40.074 226.91,43.194 226.91,44.564 226.45,44.564 223.79,44.564 210.566,31.34 210.566,26.85
NetC27_2 on Component Side "Component Side-No Net" (solid, pour order 3396): 219.38,43.51 219.38,47.43 205.35,33.4 209.27,33.4
GND on Component Side "Component Side-No Net" (solid, pour order 3421): 211.214,100.394 193.548,100.394 193.548,92.774 211.214,92.774
GND on Component Side "Component Side-No Net" (solid, pour order 3417): 106.898,93.09 106.898,100.456 91.072,100.456 91.072,93.09
NetC4_D_2 on Component Side "NETC11_LV2_2_L01_P617" (solid, remove dead copper, pour order 3429): 208.928,86.17 190.386,86.17 190.386,77.026 194.704,77.026 194.704,66.612 195.466,66.612 198.514,70.93 199.784,70.93 208.928,70.93
GND on Component Side "GND_L01_P624" (solid, pour order 3436): 186.83,60.516 186.83,74.994 189.878,74.994 189.878,78.042 189.37,78.042 189.37,78.166 188.862,78.674 188.862,99.314 176.022,99.314 176.022,60.516
-5VBRTN on Component Side "-5VGNDB_L01_P607" (solid, pour order 3422): 205.372,49.683 205.372,38.862 189.116,38.862 189.116,49.683
NetD3_D_1 on Component Side "NETD7_LV2_1_L01_P605" (solid, pour order 3408): 205.372,50.038 205.372,55.372 191.656,55.372 191.656,50.038
SW_D on Component Side "SW_LV2_L01_P594" (solid, pour order 3404): 208.928,60.516 188.1,60.516 188.1,72.962 190.132,72.962 190.132,65.088 190.386,64.834 192.164,63.056 192.672,62.548 208.928,62.548
-5VB on Component Side "-5VB_L01_P610" (solid, pour order 3423): 187.846,57.976 178.448,57.976 178.448,38.862 187.846,38.862
NetF2_D_1 on Component Side "NETF2_LV2_1_L01_P582" (solid, pour order 3390): 208.928,87.44 200.546,87.44 200.546,88.745 200.546,91.504 201.689,91.504 208.928,91.504
NetD2_D_2 on Component Side "NETD8_LV2_2_L01_P587" (solid, pour order 3391): 205.88,69.152 198.26,69.152 198.26,64.58 205.88,64.58
NetC5_D_1 on Component Side "NETC13_LV2_1_L01_P574" (solid, pour order 3375): 208.928,64.072 206.134,64.072 206.134,70.422 208.928,70.422
GND on Component Side "GND_L01_P566" (solid, pour order 3368): 197.498,78.296 197.498,75.502 197.498,73.47 195.72,73.47 195.72,76.518 195.974,76.518 195.974,78.296
GND on Component Side "GND_L01_P578" (solid, pour order 3385): 184.544,76.01 195.808,76.01 195.808,71.692 194.704,71.692 194.704,72.809 193.79,73.724 184.544,73.724
NetLT1_D_1 on Component Side "NETLT2_LV2_1_L01_P571" (solid, pour order 3369): 195.58,80.764 192.926,80.845 192.926,76.772 195.58,76.772
GND on Component Side "GND_L01_P564" (solid, pour order 3365): 94.628,78.054 94.628,75.502 94.628,73.47 92.85,73.47 92.85,76.518 93.104,76.518 93.104,78.054
-5VARTN on Component Side "-5VGNDA_L01_P620" (solid, pour order 3435): 102.248,49.53 102.248,20.84 86.246,20.84 86.246,49.53
NetD3_A_1 on Component Side "NETD7_LV4_1_L01_P604" (solid, pour order 3398): 102.248,50.038 102.248,54.102 88.024,54.102 88.024,50.038
SW_A on Component Side "SW_LV4_L01_P595" (solid, pour order 3405): 106.058,60.516 85.23,60.516 85.23,72.962 87.262,72.962 87.262,65.088 87.516,64.834 89.294,63.056 89.802,62.548 106.058,62.548
-5VA on Component Side "-5VA_L01_P619" (solid, pour order 3426): 84.976,54.102 75.832,54.102 75.832,27.29 84.976,27.29
NetF2_A_1 on Component Side "NETF2_LV4_1_L01_P581" (solid, pour order 3389): 106.058,87.248 97.676,87.248 97.676,88.553 97.676,91.312 98.819,91.312 106.058,91.312
NetD2_A_2 on Component Side "NETD8_LV4_2_L01_P586" (solid, pour order 3392): 103.01,69.152 95.39,69.152 95.39,64.58 103.01,64.58
NetC5_A_1 on Component Side "NETC13_LV4_1_L01_P575" (solid, pour order 3374): 106.058,64.072 103.264,64.072 103.264,70.422 106.058,70.422
NetLT1_A_1 on Component Side "NETLT2_LV4_1_L01_P568" (solid, pour order 3370): 92.943,80.772 90.17,80.772 90.056,76.772 92.943,76.772
GND on Component Side "GND_L01_P577" (solid, pour order 3384): 81.674,76.01 92.938,76.01 92.938,71.692 91.834,71.692 91.834,72.809 90.92,73.724 81.674,73.724
GND on Component Side "GND_L01_P626" (solid, pour order 3441): 84.043,60.634 84.043,75.112 87.091,75.112 87.091,78.16 86.583,78.16 86.583,78.284 86.075,78.792 86.075,92.638 86.075,106.608 22.86,106.608 22.86,60.634
VINB on Component Side "Component Side-No Net" (solid, pour order 3403): 195.466,91.312 195.466,87.248 189.878,87.248 189.878,103.759 193.18,103.759 193.18,92.074 193.942,91.312 195.72,91.312
VINA on Component Side "Component Side-No Net" (solid, pour order 3407): 92.596,91.312 92.596,87.248 87.008,87.248 87.008,105.232 90.31,105.232 90.31,92.074 91.072,91.312 92.85,91.312
GND on Component Side "Component Side-No Net" (solid, pour order 3440): 210.058,100.394 228.6,100.394 228.6,95.504 228.854,95.25 238.252,95.25 238.252,50.292 210.058,50.292
VINA on Component Side "Component Side-No Net" (solid, pour order 3411): 122.911,102.832 87.198,102.832 87.198,105.245 122.911,105.245
-5VARTN on Component Side "Component Side-No Net" (solid, pour order 3433): 225.14,20.33 225.14,23.1 86.22,23.1 86.22,20.33
NetC41_1 on Component Side "Component Side-No Net" (solid, pour order 3432): 81.469,16.74 81.469,19.34 225.09,19.34 225.09,16.74
NetC27_2 on Component Side "Component Side-No Net" (solid, pour order 3419): 172.63,36.85 172.63,33.4 209.16,33.4 209.16,36.85
32V on Component Side "Component Side-No Net" (solid, pour order 3395): 238.252,101.6 238.252,95.758 231.394,95.758 231.394,101.6
NetC18_B_2 on Component Side "Component Side-No Net 1" (solid, pour order 3382): 123.19,77.47 115.57,77.47 115.57,81.026 123.19,81.026
NetC13_C_2 on Component Side "Component Side-No Net" (solid, pour order 3402): 149.214,74.878 153.779,74.878 154.235,74.422 154.235,69.417 159.875,69.417 159.875,74.243 161.118,74.243 162.161,75.09 162.161,77.239 149.214,77.239
NetC18_C_1 on Component Side "Component Side-No Net" (solid, pour order 3371): 162.299,77.014 157.48,77.014 157.48,79.502 162.299,79.502
NetC18_C_2 on Component Side "Component Side-No Net 1" (solid, pour order 3383): 156.972,77.47 149.352,77.47 149.352,81.026 156.972,81.026
NetC41_1 on Component Side "Component Side-No Net" (solid, pour order 3381): 78.36,16.74 81.9,16.74 81.9,24.37 78.36,24.37
+5VBRTN on Component Side "Component Side-No Net" (solid, pour order 3430): 210.82,26.84 210.82,31.35 142.494,31.35 142.494,26.84
NetC27_2 on Component Side "Component Side-No Net 2" (solid, pour order 3373): 219.26,43.41 221.02,45.17 226.4,45.17 226.4,46.901 226.118,47.29 219.26,47.29
+5VB_FILTERED on Component Side "Component Side-No Net 2" (solid, pour order 3394): 229.67,49.18 229.98,49.49 238.57,49.49 238.57,45.2 238.43,45.06 238.37,45 229.67,45
+5VGNDB on Component Side "Component Side-No Net 2" (solid, pour order 3393): 229.65,44.2 229.96,44.51 238.55,44.51 238.55,40.22 238.41,40.08 238.35,40.02 229.65,40.02
GND on Signal Layer 1 "Component Side-No Net 2" (solid, pour order 3442): 23.27,109.06 239.31,109.06 239.31,11.49 239.16,11.34 23.13,11.34
+5V on Signal Layer 2 "Component Side-No Net 2" (solid, pour order 3443): 35.05,76.01 62.99,76.01 62.99,56.69 35.05,56.69

## Other copper
Component Side:
  pour cut-out: 194.704,71.692 194.704,70.676 195.974,70.676 195.974,71.526 195.808,71.692
  pour cut-out: 91.834,71.692 91.834,70.676 93.104,70.676 93.104,71.526 92.938,71.692
  pour cut-out: 130.024,79.604 128.422,79.604 128.524,79.502 128.524,74.234 129.982,74.234 130.024,74.234
  pour cut-out: 163.839,79.538 162.237,79.538 162.339,79.436 162.339,74.168 163.797,74.168 163.839,74.168
Bottom Layer:
  pour cut-out: 130.024,82.55 128.016,82.55 128.016,74.234 129.982,74.234 130.024,74.234
  pour cut-out: 163.839,81.28 162.052,81.28 162.052,74.168 163.797,74.168 163.839,74.168

## Silkscreen, mask and mechanical layers (free items; w line width, h text height)
Top Overlay:
  lines w0.254: 215.69,78.14 216.81,78.14 ; 217.65,71.52 217.65,72.54
  text "SCB" at 224.34,69.75 h1.52
  text "SCA" at 224.88,54.56 h1.52
  text "-5V A" at 30.48,43.688 h0.8
  text "+5V A" at 32.512,38.1 h0.8
  text "-5V B" at 178.562,35.56 h0.8
  text "-5V B" at 31.75,32.004 h0.8
  text "+5V B" at 153.924,28.448 h0.8
  text "+5V A" at 116.332,28.194 h0.8
  text "-5V A" at 84.074,27.94 h0.8
  text "+5V B" at 32.258,26.162 h0.8
Mechanical 1:
  the board outline again, w0.127
Mechanical 6:
  lines w0.5: 22,109.982 22,10.414 22,10.352 22.352,10 172.974,10 242.062,10 242.062,110 22.018,110

## Text inside footprints (layer, text, board x,y; h text height)
LDO1: Top Overlay "3" at 47.961,57.032 h1.26; Top Overlay "4" at 48.825,63.89 h1.26; Top Overlay "1" at 43.467,57.032 h1.26; Top Overlay "2" at 45.629,57.023 h1.26